# EAGLE board Sparkle_and_Shine (EAGLE 9.4.2)
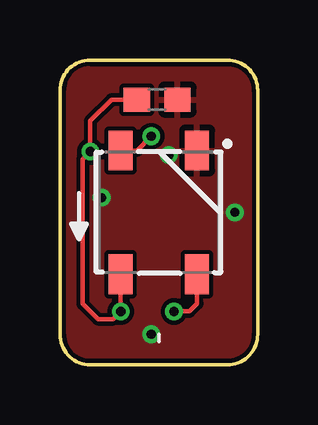
[diagram p0: board, top side]
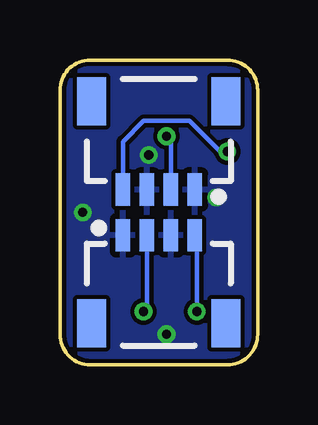
[diagram p1: board, bottom side, seen from below]

Size 8.26 x 12.7 mm. Coordinates in mm from the lower left corner, seen from the top.
Outline: 1.27,12.7 6.99,12.7 arc-90 8.26,11.43 8.26,1.27 arc-90 6.99,0 1.27,0 arc-90 0,1.27 0,11.43 arc-90 1.27,12.7
Copper layers (1*16): Top 0.035mm / dielectric 1.5mm / Bottom 0.035mm
Design rules "SparkFun-2-layer-TIGHT": minimum track width 7mil, minimum drill 15mil, track to track 7mil, track to pad 7mil, pad to pad 7mil, via to via 7mil, smd to smd 7mil, copper to edge 7mil, drill to drill 7mil, minimum pad ring 7mil, minimum via ring 7mil, stop-mask expansion 4mil, vias tented up to drill 25mil, thermal gap 10mil

## Footprints (pad centres in the part's own frame; a part is rotated, then mirrored left to right if it is on the bottom)
0603 = smd 1.1 x 1: 1 -0.85,0; 2 0.85,0
WS2812B = smd 1.651 x 1: 1 2.577,-1.6; 2 2.577,1.6; 3 -2.577,1.6; 4 -2.577,-1.6
1X04_1MM_RA = smd 0.6 x 1.35: 1 -1.5,0; 2 -0.5,0; 3 0.5,0; 4 1.5,0 | smd 1.2 x 2: NC1 2.8,-3.675; NC2 -2.8,-3.675

## Placement (x,y rotation side)
C1  0.1uF  [0603]  4.05,11.05 0 top
D1  WS2812B  [WS2812B]  4.13,6.35 270 top
J1  SMD  [1X04_1MM_RA]  4.13,5.4 0 bottom
J2  SMD  [1X04_1MM_RA]  4.13,7.3 180 bottom

## Library data of the parts
C1 = SparkFun-Capacitors; PROD_ID: CAP-00810
D1 = SparkFun-LED; PROD_ID: DIO-12503
J1 J2 = SparkX

## Nets
DI: D1.4 J2.2
DO: D1.2 J1.2
GND: C1.2 D1.3 J1.1 J1.3 J2.1 J2.3
VCC: C1.1 D1.1 J1.4 J2.4

## Tracks (layer width: path | path; a pad name or v marks a point on that pad's centre or on a via)
DI  (via drill 0.38)
  Top 0.178: v3.81,9.52 3.21,8.93 D1.4
  Bottom 0.178: J2.2 3.63,9.34 v3.81,9.52
DO  (via drill 0.38)
  Top 0.178: v4.76,2.22 5.4,2.22 5.73,2.55 D1.2
  Bottom 0.178: J1.2 4.63,2.36 v4.76,2.22
GND  (via drill 0.38)
  other vias: 4.54,8.74 7.3,6.35 3.81,1.27 1.74,6.97
  pour Top: 0,12.7 8.26,12.7 8.26,0 0,0
  pour Bottom: 0,12.7 8.26,12.7 8.26,0 0,0
VCC  (via drill 0.38)
  Top 0.178: C1.1 2.16,11.05 1.27,10.16 v1.27,8.89 0.95,8.57 0.95,2.54 1.59,1.91 2.22,1.91 v2.54,2.22 2.54,3.76 D1.1
  Bottom 0.178: J1.4 2.54,5.31 v2.54,2.22 | J2.4 5.63,9.3 4.76,10.16 2.86,10.16 1.59,8.89 v1.27,8.89